# Altium PCB Net.PcbDoc
Units mil, origin at the board's own origin, x right, y up, seen from the top; angles counter-clockwise.
Board outline 860 x 1460 mil, 2 copper layers (Top Layer, Bottom Layer), stack 22.822 mil thick; 20 components, 20 nets, 130 pads, 11 vias.
Unrouted connection lines stored in the file: 6.
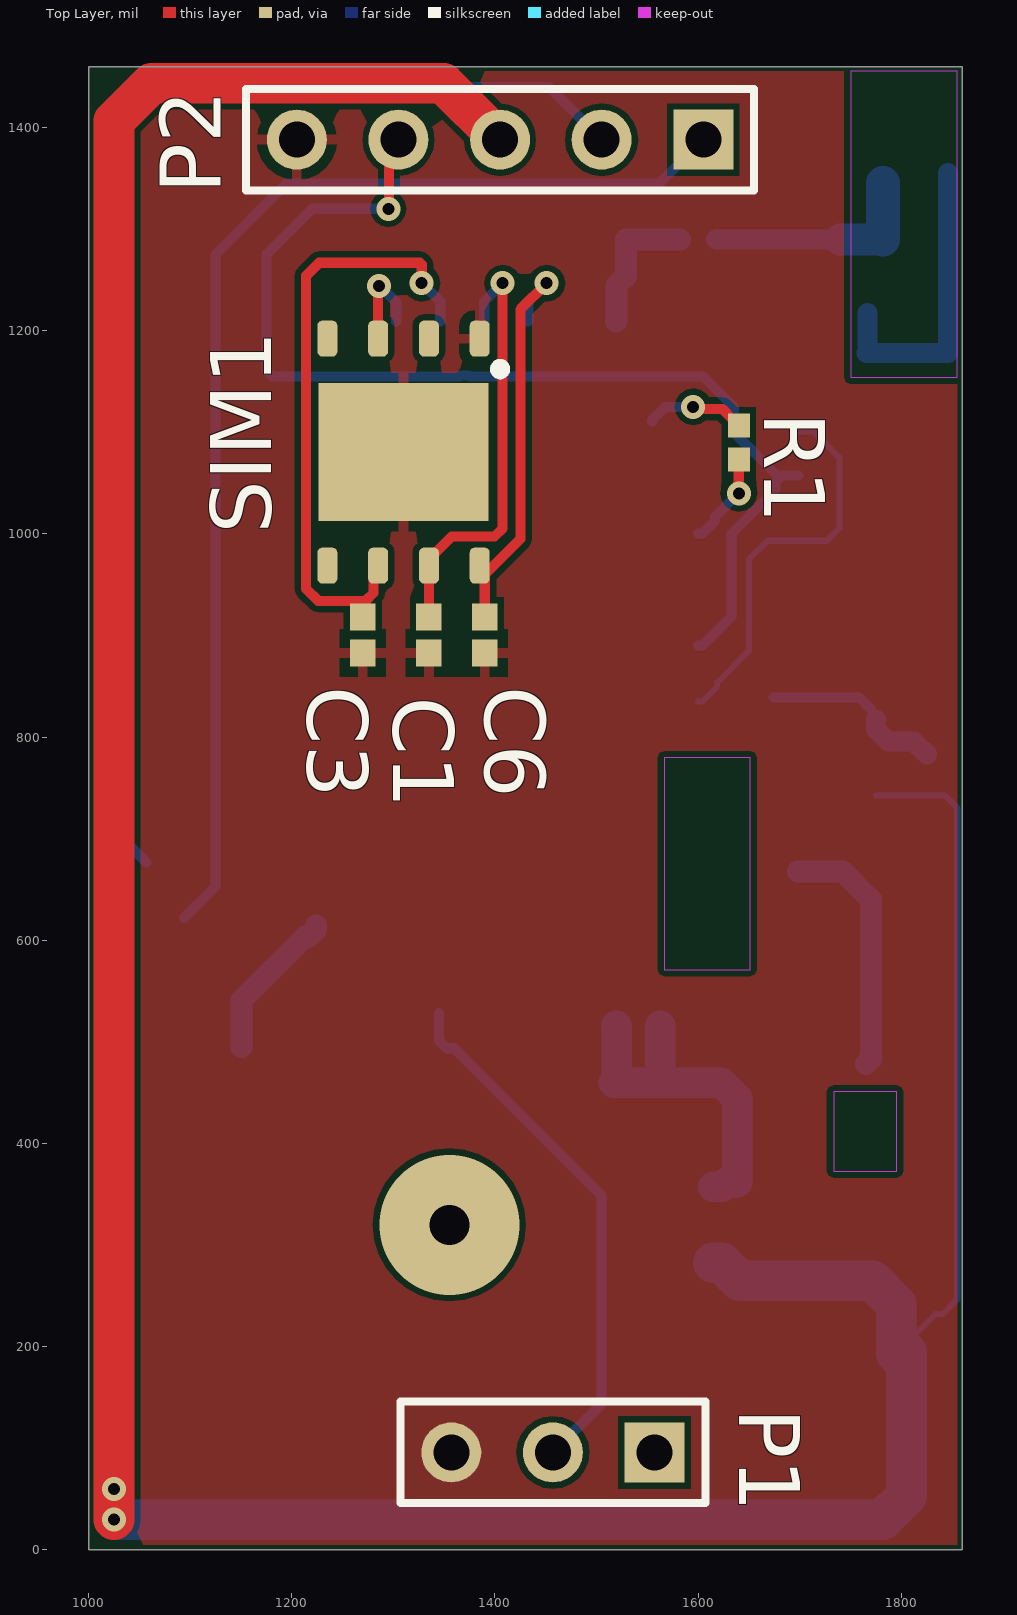
[diagram p0: Top Layer view]
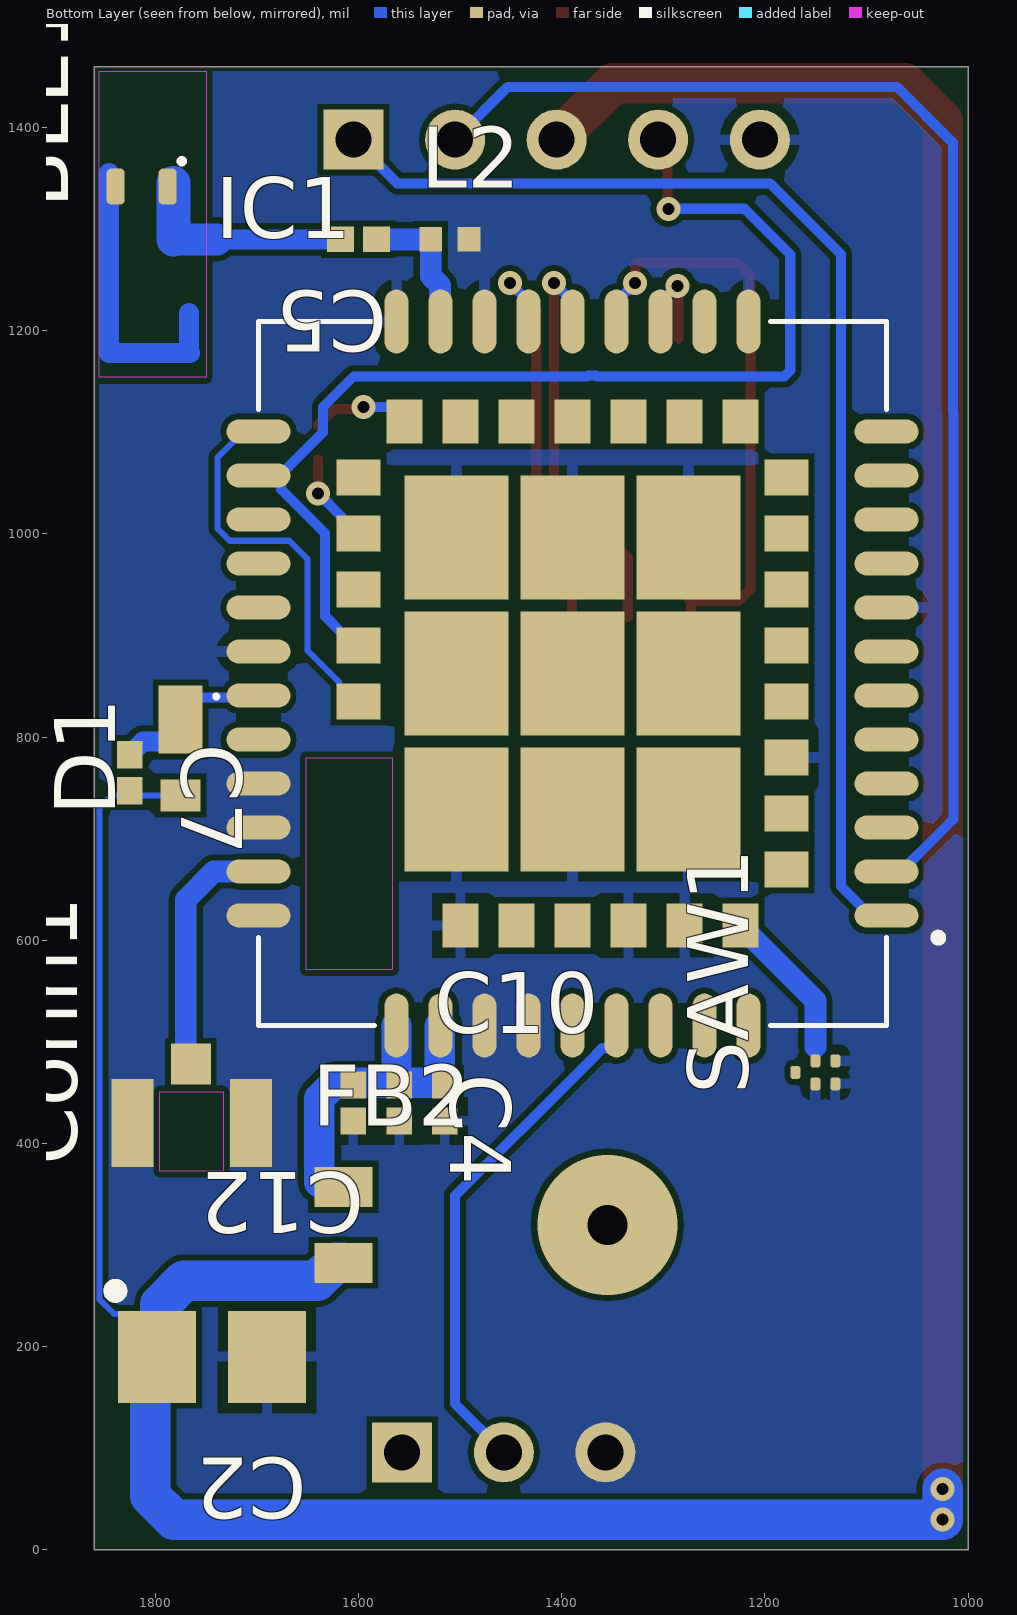
[diagram p1: Bottom Layer view, seen from below]
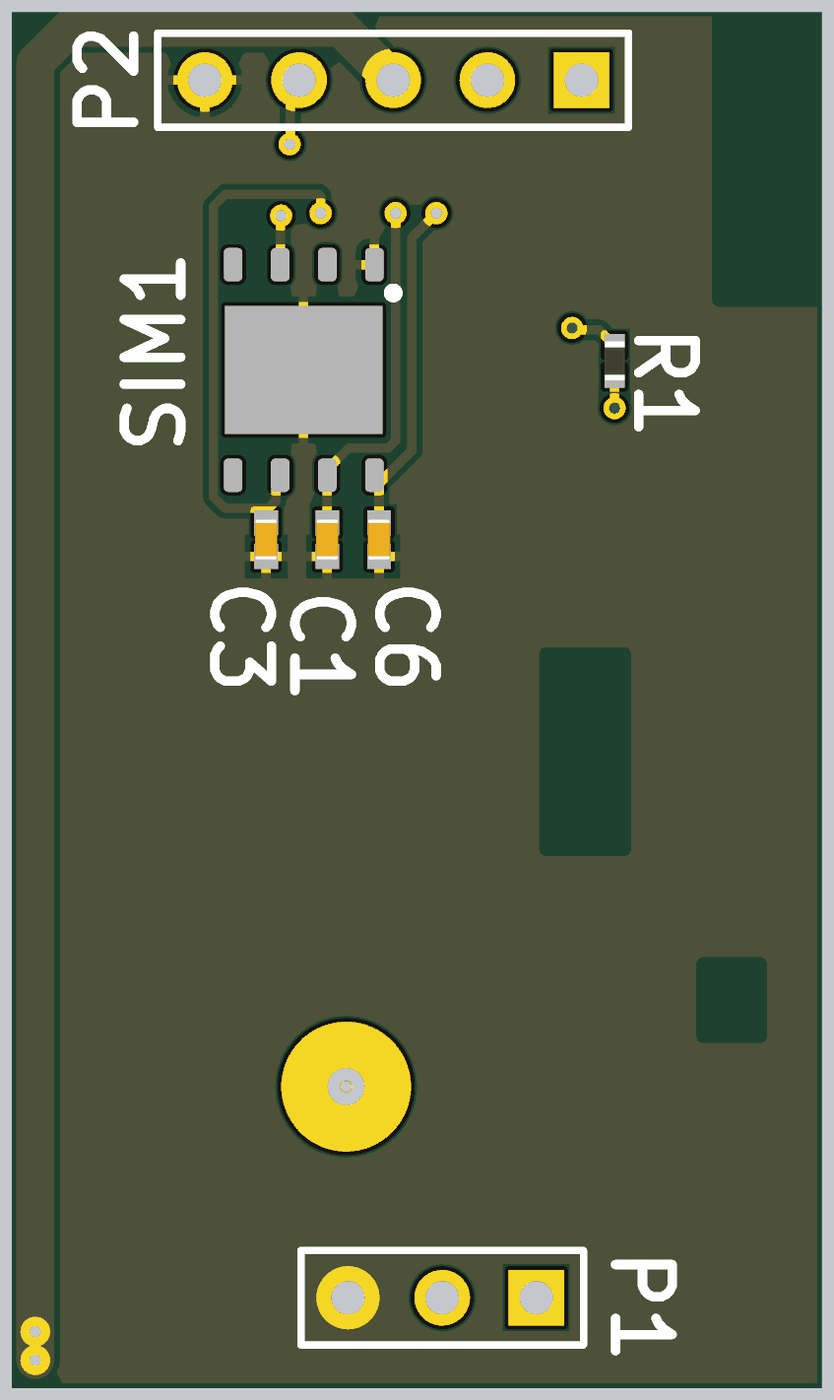
[diagram p2: 3D render of the assembled board from above, using the file's embedded part models]
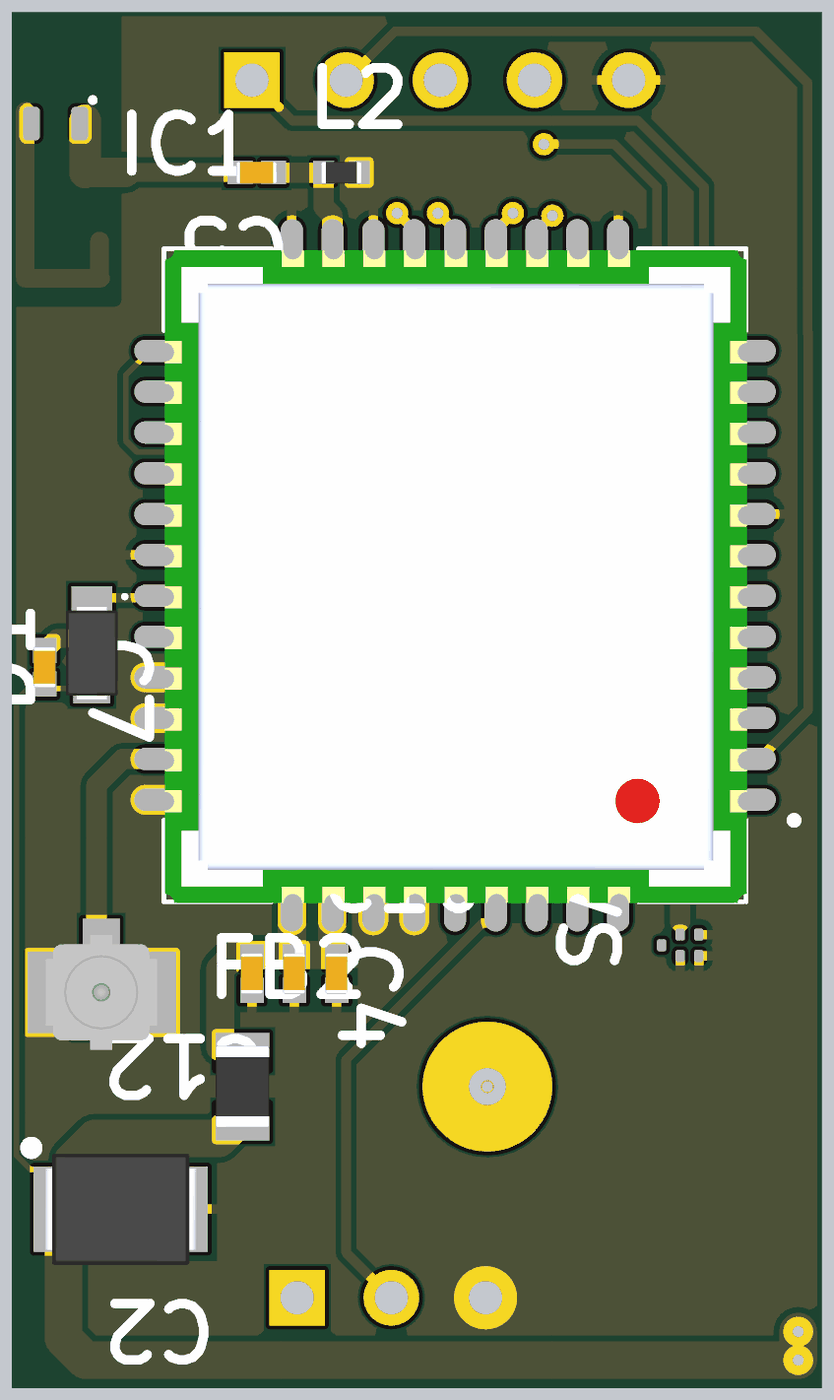
[diagram p3: 3D render of the assembled board from below, using the file's embedded part models]

## Layer stack, top to bottom
Top Solder: solder mask 0.4, Solder Resist, Dk 3.5
Top Layer: signal copper 1.378
Dielectric 1: prepreg 20.066, PP-007, Dk 4.25
Bottom Layer: signal copper 1.378
Bottom Solder: solder mask 0.4, Solder Resist, Dk 3.5

## Board outline
1000,0 1860,0 1860,1460 1000,1460

## Design rules (kind name [scope] priority, off if disabled: settings)
Clearance [All] p1: gap=6 ignorepadtopadclearanceinfootprint=FALSE
PlaneConnect [All] p1: pad.planeconnectstyle=Relief pad.reliefexpansion=20 pad.reliefentries=4 pad.reliefconductorwidth=10 pad.reliefairgap=10 via.planeconnectstyle=Direct via.reliefexpansion=20 via.reliefentries=4 via.reliefconductorwidth=10 via.reliefairgap=10
PolygonConnect [All] p1: connectstyle=Relief reliefconductorwidth=10 reliefentries=4 polygonreliefangle="90 Angle" airgapwidth=10
RoomDefinition Net [InComponentClass('Net')] p1 off: confinementstyle=ConfineIn formatcopy=TRUE lockcomponents=FALSE outline 2155,-40 4750,-40 4750,580 2155,580
RoutingVias [All] p1: holewidth=11.81 width=23.62 viastyle="Through Hole" minholewidth=11.81 minwidth=23.62 maxholewidth=39.37 maxwidth=59.06
SolderMaskExpansion [All] p1: expansion=4 istentingtop=FALSE
Width antenne [InNetClass('antenne')] p1: maxlimit=21.59 minlimit=21.59 preferedwidth=21.59 impedanceprofiledriven=TRUE impedanceprofileid={338AAD26-193B-48B1-B657-317FF01A63F2} impedanceprofilevalue=50.000000 minimp=50.000000 maximp=50.000000 favimp=50.000000
Width [All] p2: maxlimit=50 minlimit=6 preferedwidth=10
29 further rules are at their usual default settings.

## Components (designator, comment, footprint, x,y, rotation, side; value= is the part's Value field where it differs from the comment)
BLE1 "BLE chip" "BLE antenna" 1839.08,1341.92 r180 bottom locked
C1 "22p" CAPC1005X06N 1335,900.48 r90 top
C2 "100u" CAPMP3528X21N 1744.25,190 r180 bottom
C3 "22p" CAPC1005X06N 1270,900.48 r90 top
C4 "22p" CAPC1005X06N 1560,440 r90 bottom
C5 "8.2p" CAPC1005X06N 1600,1290 r180 bottom
C6 "100n" CAPC1005X06N 1390,900.48 r270 top
C7 "22p" CAPC1005X06N 1825,765 r90 bottom
C10 "100n" CAPC1005X06N 1515,440 r270 bottom
C12 "10p" CAPC1005X06N 1605,440 r90 bottom
Conn1 "2337019-1" IPEX_CONNECTOR_RF 1842.37,420.04 r180 bottom
D1 "SS13HE" SODFL250X75-2N 1775,780 r270 bottom
FB2 "FBMH2012HM221-T" INDC2012X14N 1615,320 r270 bottom
IC1 "SIM868e" SIM868E 1079.37,1207.56 r0 bottom
L2 "1.5n" INDC1005X06N 1510,1290 r0 bottom
P1 "Header 3" HDR1X3 1556.97,95.98 r180 top locked
P2 "Header 5" HDR1X5 1605,1387.99 r180 top locked
R1 "10k" RESC1005X04N 1640,1090 r90 top
SAW1 "GPS filter" SAW 1170,470 r180 bottom
SIM1 "SIM-E-MFF2-GL" "MFF2 SIM" 1385,1192.21 r270 top

## Footprints (in the part's own frame and the unit in brackets; to place one, negate y for a bottom-side part, rotate by r counter-clockwise, add the part's x,y. Pads: shape width x height; smd on the part's side, far side on the other; paste and mask are expansions set on the pad)
"BLE antenna" [mm] "antenna bluethooth"
  rrect50% 0.45x0.9 smd: 1(1.3,0) 2(0,0)
  silkscreen extent 1.65,0.63 1.66,0.64
CAPC1005X06N [mm] "Chip Capacitor, 0402, 2-Leads, Body 1,02x0,50mm, IPC Medium Density"
  rect 0.68x0.64 smd: 1(-0.45,0) 2(0.45,0)
  body extent -0.55,-0.3 0.55,0.3, height 0.6
CAPMP3528X21N [mm] "Molded Capacitor, 2-Leads, Body 3,50x2,80mm, IPC Medium Density"
  rect 1.95x2.3 smd: 1(-1.375,0) 2(1.375,0)
  silkscreen extent -2.56,1.5 -2.26,1.8, body extent -2.07,-1.5 2.07,1.5, height 2.1
HDR1X3 [mm] "Connector; Header; 3 Position"
  rect 1.5x1.5 hole 0.9: 1(0,0)
  round 1.5 hole 0.9: 2(2.54,0) 3(5.08,0)
  silkscreen extent -1.27,-1.27 6.35,1.27
HDR1X5 [mm] "Connector; Header; 5 Position"
  rect 1.5x1.5 hole 0.9: 1(0,0)
  round 1.5 hole 0.9: 2(2.54,0) 3(5.08,0) 4(7.62,0) 5(10.16,0)
  silkscreen extent -1.27,-1.27 11.43,1.27
INDC1005X06N [mm] "Chip Inductor, 2-Leads, Body 1,00x0,50mm, IPC Medium Density"
  rect 0.57x0.62 smd: 1(-0.48,0) 2(0.48,0)
  body extent -0.55,-0.3 0.55,0.3, height 0.6
INDC2012X14N [mm] "Chip Inductor, 2-Leads, Body 2,00x1,25mm, IPC Medium Density"
  rect 1x1.45 smd: 1(-0.95,0) 2(0.95,0)
  body extent -1.1,-0.72 1.1,0.72, height 1.45
IPEX_CONNECTOR_RF [mm]
  rect 1x1.02 smd: 1(1.965,1.479)
  rect 1.05x2.2 smd: 2(0.508,0) 2(3.464,-0.001)
  Keep-Out Layer region: 1.192,-1.201 1.192,0.785 2.771,0.785 2.771,-1.201
  body extent 0.47,-1.55 3.47,1.55, height 1.23
"MFF2 SIM" [mm] "SIM-E-MFF2-GL footprint"
  rrect50% 0.9x0.5 smd: 1(0,0) 2(0,-1.27) 3(0,-2.54) 4(0,-3.81) 5(5.675,-3.81) 6(5.675,-2.54) 7(5.675,-1.27) 8(5.675,0)
  rect 3.45x4.25 smd: 9(2.838,-1.905)
  silkscreen extent 0.64,0.38 0.89,0.64, body extent -0.25,-4.44 5.89,0.6, height 0.75
RESC1005X04N [mm] "Chip Resistor, 0402, 2-Leads, Body 1,00x0,50mm, IPC Medium Density"
  rect 0.6x0.55 smd: 1(-0.425,0) 2(0.425,0)
  body extent -0.53,-0.28 0.53,0.28, height 0.37
SAW [mm] "filtro saw"
  rrect50% 0.25x0.325 smd: 1(0,0) 2(0.5,-0.288) 3(1,-0.288) 4(0.5,0.288) 5(1,0.288)
  body extent -0.24,-0.64 1.4,0.64, height 0.7
SIM868E [mm]
  oval 1.6x0.6 smd: 1(0.024,14.813) 2(0.024,13.713) 3(0.024,12.613) 4(0.024,11.513) 5(0.024,10.413) 6(0.024,9.313) 7(0.024,8.213) 8(0.024,7.113) 9(0.024,6.013) 10(0.024,4.913) 11(0.024,3.813) 12(0.024,2.713) 22(15.724,2.713) 23(15.724,3.813) 24(15.724,4.913) 25(15.724,6.013) 26(15.724,7.113) 27(15.724,8.213) 28(15.724,9.313) 29(15.724,10.413) 30(15.724,11.513) 31(15.724,12.613) 32(15.724,13.713) 33(15.724,14.813)
  oval 0.6x1.6 smd: 13(3.474,-0.037) 14(4.574,-0.037) 15(5.674,-0.037) 16(6.774,-0.037) 17(7.874,-0.037) 18(8.974,-0.037) 19(10.074,-0.037) 20(11.174,-0.037) 21(12.274,-0.037) 34(12.274,17.563) 35(11.174,17.563) 36(10.074,17.563) 37(8.974,17.563) 38(7.874,17.563) 39(6.774,17.563) 40(5.674,17.563) 41(4.574,17.563) 42(3.474,17.563)
  rect 1.1x0.9 smd paste-2: 43(2.524,13.663) 44(2.524,12.263) 45(2.524,10.863) 46(2.524,9.463) 47(2.524,8.063) 48(2.524,6.663) 49(2.524,5.263) 50(2.524,3.863) 58(13.224,3.863) 59(13.224,5.263) 60(13.224,6.663) 61(13.224,8.063) 62(13.224,9.463)
  rect 0.9x1.1 smd paste-2: 51(3.674,2.463) 52(5.074,2.463) 53(6.474,2.463) 54(7.874,2.463) 55(9.274,2.463) 56(10.674,2.463) 57(12.074,2.463) 63(10.674,15.063) 64(9.274,15.063) 65(7.874,15.063) 66(6.474,15.063) 67(5.074,15.063) 68(3.674,15.063)
  rect 2.6x3.1 smd paste-3: 69(4.974,12.163) 70(4.974,8.763) 71(4.974,5.363) 72(7.874,5.363) 73(10.774,5.363) 74(10.774,8.763) 75(10.774,12.163) 76(7.874,12.163) 77(7.874,8.763)
  Keep-Out Layer region: 14.524,10.867 12.382,10.867 12.382,16.163 14.524,16.163
  Keep-Out Layer region: 14.524,10.865 12.378,10.865 12.378,16.163 14.524,16.163
  Keep-Out Layer region: 14.524,10.864 12.376,10.864 12.376,16.163 14.524,16.163
  silkscreen extent -1.37,-0.04 15.72,17.56, body extent 0,0 15.7,17.6, height 2.6
SODFL250X75-2N [mm] "SODFL, 2-Leads, Body 1,27x2,50mm, IPC Medium Density"
  rect 0.8x1 smd: 1(0.95,0)
  rect 1.7x1.1 smd: 2(-0.95,0)
  silkscreen extent -1.57,0.84 -1.47,0.94, body extent -1.25,-0.7 1.25,0.7, height 0.75

## Part data
BLE1: library part 2450AT14A0100T, "RF ANT 2.4GHZ CHIP SOLDER SMD", Manufacturer=Johanson, Max Power Dissipation=2W, Supplier Part Number 1=712-1636-1-ND, ComponentLink1Description=https://www.johansontechnology.com/datasheets/2450AT14A0100/2450AT14A0100.pdf?src-supplier=Digi-Key, ComponentLink1URL=https://www.johansontechnology.com/datasheets/2450AT14A0100/2450AT14A0100.pdf?src-supplier=Digi-Key, Manufacturer Part Number=2450AT14A0100T, Mount="Surface Mount", Number of Bands=1, Packaging="Tape and Reel", Pricing 1="1=0,42000, 10=0,35600, 25=0,33240, 100=0,26600, 250=0,24700, 500=0,20900, 1000=0,16150 (USD)", Return Loss=9dB, RoHS=No, Stock 1=5238, Supplier 1=Digi-Key, Termination=Solder
C1 C3 C4 C7: library part 04025A220GAT2A, "CAP CER 22PF 50V C0G/NP0 0402", Capacitance=22pF, Case Code (Imperial)=0402, Case Code (Metric)=1005, Dielectric=C0G, Manufacturer="Kyocera AVX", Max Operating Temperature=125°C, Min Operating Temperature=-55°C, Package Quantity=1, Supplier Part Number 1=478-7874-1-ND, Tolerance=2%, Voltage Rating=50V, Case/Package=0402, Category="Ceramic Capacitors", ComponentLink1Description=https://datasheet.ciiva.com/7614/ccog-7614677.pdf?src-supplier=Digi-Key, ComponentLink1URL=https://datasheet.ciiva.com/7614/ccog-7614677.pdf?src-supplier=Digi-Key, ComponentLink2Description=https://datasheet.ciiva.com/17490/ccog-17490486.pdf?src-supplier=Avnet+Europe, ComponentLink2URL=https://datasheet.ciiva.com/17490/ccog-17490486.pdf?src-supplier=Avnet+Europe, ComponentLink3Description=https://datasheet.ciiva.com/5413/ccog-243403-5413992.pdf?src-supplier=Mouser, ComponentLink3URL=https://datasheet.ciiva.com/5413/ccog-243403-5413992.pdf?src-supplier=Mouser, ComponentLink4Description=https://datasheet.ciiva.com/210/ccog-210553.pdf?src-supplier=Digi-Key, ComponentLink4URL=https://datasheet.ciiva.com/210/ccog-210553.pdf?src-supplier=Digi-Key, ComponentLink5Description=https://datasheet.ciiva.com/11530/ccog-11530027.pdf?src-supplier=Avnet, ComponentLink5URL=https://datasheet.ciiva.com/11530/ccog-11530027.pdf?src-supplier=Avnet, ComponentLink6Description=https://datasheet.ciiva.com/14886/ccog-14886974.pdf?src-supplier=Digi-Key, ComponentLink6URL=https://datasheet.ciiva.com/14886/ccog-14886974.pdf?src-supplier=Digi-Key, Construction=Flat, Depth=0.5mm, Height=0.63mm, Lead Free="Lead Free", Length=1mm, Manufacturer Part Number=04025A220GAT2A, Mount="Surface Mount", Packaging="Tape and Reel", Pricing 1="1=0,50000, 10=0,35200, 50=0,26600, 100=0,23170, 500=0,17160, 1000=0,14586, 2500=0,13728, 5000=0,12870 (USD)", Radiation Hardening=No, RoHS=Yes, RoHS Compliant=Yes, Series=-, Stock 1=14713, Supplier 1=Digi-Key, Termination=SMD/SMT, Thickness=0.022inch, Voltage Rating (DC)=50V, Width=0.02inch
C2: library part TPSB107K006R0250, "Capacitor; Tantalum; Cap 100 uF; Tol 10%; Vol-Rtg 6.3 VDC; SMT; 3528; ESR 250 mOhms; CT", Capacitance=100uF, Case Code (Imperial)=1210, Case Code (Metric)=3528, Dielectric Material=Tantalum, ESR (Equivalent Series Resistance)=250mR, Leakage Current=6.3uA, Manufacturer="Kyocera AVX", Max Operating Temperature=125°C, Min Operating Temperature=-55°C, Package Quantity=1, Supplier Part Number 1=478-3080-1-ND, Tolerance=10%, Voltage=6.3V, Case/Package=1210, Category="Tantalum Capacitors", ComponentLink1Description=https://datasheet.ciiva.com/264/tps-264099.pdf?src-supplier=Digi-Key, ComponentLink1URL=https://datasheet.ciiva.com/264/tps-264099.pdf?src-supplier=Digi-Key, ComponentLink2Description=https://datasheet.ciiva.com/16501/tps-16501596.pdf?src-supplier=Future+Electronics, ComponentLink2URL=https://datasheet.ciiva.com/16501/tps-16501596.pdf?src-supplier=Future+Electronics, ComponentLink3Description=https://datasheet.ciiva.com/14603/70001047-14603743.pdf?src-supplier=Allied+Electronics, ComponentLink3URL=https://datasheet.ciiva.com/14603/70001047-14603743.pdf?src-supplier=Allied+Electronics, ComponentLink4Description=https://datasheet.ciiva.com/264/tps-264097.pdf?src-supplier=Digi-Key, ComponentLink4URL=https://datasheet.ciiva.com/264/tps-264097.pdf?src-supplier=Digi-Key, ComponentLink5Description=https://datasheet.ciiva.com/264/tps-264098.pdf?src-supplier=Digi-Key, ComponentLink5URL=https://datasheet.ciiva.com/264/tps-264098.pdf?src-supplier=Digi-Key, ComponentLink6Description=https://datasheet.ciiva.com/3004/tps-3004597.pdf?src-supplier=Avnet, ComponentLink6URL=https://datasheet.ciiva.com/3004/tps-3004597.pdf?src-supplier=Avnet, ComponentLink7Description=https://datasheet.ciiva.com/7720/1680477-7720696.pdf?src-supplier=Element14, ComponentLink7URL=https://datasheet.ciiva.com/7720/1680477-7720696.pdf?src-supplier=Element14, ComponentLink8Description=https://datasheet.ciiva.com/22703/1441576-22703321.pdf?src-supplier=Element14, ComponentLink8URL=https://datasheet.ciiva.com/22703/1441576-22703321.pdf?src-supplier=Element14, ComponentLink9Description=https://datasheet.ciiva.com/12911/tps-23028-12911388.pdf?src-supplier=Mouser, ComponentLink9URL=https://datasheet.ciiva.com/12911/tps-23028-12911388.pdf?src-supplier=Mouser, ComponentLink10Description=https://datasheet.ciiva.com/17339/tps-17339804.pdf?src-supplier=Avnet+Europe, ComponentLink10URL=https://datasheet.ciiva.com/17339/tps-17339804.pdf?src-supplier=Avnet+Europe, Construction=Flat, Depth=2.8mm, Dissipation Factor=10%, Features="General Purpose", Height=1.9mm, Height - Seated (Max)=0.083inch, Lead Free="Lead Free", Lead Pitch=1.4mm, Length=3.5mm, Manufacturer Part Number=TPSB107K006R0250, Mount="Surface Mount,PCB", Number of Pins=2, Packaging="Tape and Reel", Polarity=Polar, Pricing 1="1=0,51000, 10=0,36100, 50=0,27280, 100=0,23760, 500=0,17600, 1000=0,14960 (USD)", Radiation Hardening=No, REACH SVHC="No SVHC", RoHS=Yes, RoHS Compliant=Yes, Series=TPS, Supplier 1=Digi-Key, Termination=SMD/SMT, Voltage Rating=6.3V, Voltage Rating (DC)=6.3V, Weight=0.000564oz, Width=0.11inch
C5: library part GJM1555C1H8R2CB01D, "0402 8.2 pF 50V ±0.25 pF Tolerance C0G SMT Multilayer Ceramic Capacitor", Capacitance=8.2pF, Case Code (Imperial)=0402, Case Code (Metric)=1005, Dielectric=C0G, Manufacturer=Murata, Max Operating Temperature=125°C, Min Operating Temperature=-55°C, Package Quantity=1, Supplier Part Number 1=490-3110-1-ND, Temperature Coefficient=30ppm/°C, Voltage=50V, Case/Package=0402, Category="Ceramic Capacitors", ComponentLink1Description=https://datasheet.ciiva.com/8030/1700180-8030128.pdf?src-supplier=Element14, ComponentLink1URL=https://datasheet.ciiva.com/8030/1700180-8030128.pdf?src-supplier=Element14, ComponentLink2Description=https://datasheet.ciiva.com/17453/product-17453509.pdf?src-supplier=Avnet+Europe, ComponentLink2URL=https://datasheet.ciiva.com/17453/product-17453509.pdf?src-supplier=Avnet+Europe, ComponentLink3Description=https://datasheet.ciiva.com/11610/product-11610070.pdf?src-supplier=Avnet, ComponentLink3URL=https://datasheet.ciiva.com/11610/product-11610070.pdf?src-supplier=Avnet, ComponentLink4Description=https://datasheet.ciiva.com/159/partnumbering-e-01-159560.pdf?src-supplier=Digi-Key, ComponentLink4URL=https://datasheet.ciiva.com/159/partnumbering-e-01-159560.pdf?src-supplier=Digi-Key, ComponentLink5Description=https://datasheet.ciiva.com/159/partnumbering-e-01-159561.pdf?src-supplier=Digi-Key, ComponentLink5URL=https://datasheet.ciiva.com/159/partnumbering-e-01-159561.pdf?src-supplier=Digi-Key, ComponentLink6Description=https://datasheet.ciiva.com/11463/product-11463819.pdf?src-supplier=Avnet, ComponentLink6URL=https://datasheet.ciiva.com/11463/product-11463819.pdf?src-supplier=Avnet, Construction=Flat, Depth=0.5mm, Height=0.5mm, Lead Free="Lead Free", Lead Pitch=0.3mm, Length=1mm, Manufacturer Part Number=GJM1555C1H8R2CB01D, Mount="Surface Mount", Number of Pins=2, Packaging="Tape and Reel", Pricing 1="1=0,12000, 10=0,08500, 50=0,04620, 100=0,03770, 500=0,02696, 1000=0,02118, 2500=0,01925, 5000=0,01771 (USD)", Radiation Hardening=No, REACH SVHC="No SVHC", RoHS=Yes, RoHS Compliant=Yes, Series=GJM, Stock 1=78290, Supplier 1=Digi-Key, Termination=SMD/SMT, Thickness=0.022inch, Voltage Rating=50V, Voltage Rating (DC)=50V, Width=0.5mm
C6 C10: library part GRM155R71C104KA88D, "CAP CER 0.1UF 16V X7R 0402", Capacitance=100nF, Case Code (Imperial)=0402, Case Code (Metric)=1005, Dielectric=X7R, Dielectric Material=Ceramic, Insulation Resistance=10GR, Manufacturer=Murata, Max Operating Temperature=125°C, Min Operating Temperature=-55°C, Package Quantity=1, Supplier Part Number 1=81-GRM155R71C104KA88, Tolerance=10%, Voltage=16V, Case/Package=0402, Category="Ceramic Capacitors", ComponentLink1Description=https://datasheet.ciiva.com/18102/getdatasheetpartid-85307-18102905.pdf?src-supplier=Verical, ComponentLink1URL=https://datasheet.ciiva.com/18102/getdatasheetpartid-85307-18102905.pdf?src-supplier=Verical, ComponentLink2Description=https://datasheet.ciiva.com/129/grm155r71c104ka88-01-129739.pdf?src-supplier=Digi-Key, ComponentLink2URL=https://datasheet.ciiva.com/129/grm155r71c104ka88-01-129739.pdf?src-supplier=Digi-Key, ComponentLink3Description=https://datasheet.ciiva.com/129/grm155r71c104ka88-01-129740.pdf?src-supplier=Digi-Key, ComponentLink3URL=https://datasheet.ciiva.com/129/grm155r71c104ka88-01-129740.pdf?src-supplier=Digi-Key, ComponentLink4Description=https://datasheet.ciiva.com/29199/454098-da-01-en-vs-kondensator-0402-29199799.pdf?src-supplier=Conrad, ComponentLink4URL=https://datasheet.ciiva.com/29199/454098-da-01-en-vs-kondensator-0402-29199799.pdf?src-supplier=Conrad, ComponentLink5Description=https://datasheet.ciiva.com/28534/4360-28534133.pdf?src-supplier=Element14, ComponentLink5URL=https://datasheet.ciiva.com/28534/4360-28534133.pdf?src-supplier=Element14, ComponentLink6Description=https://datasheet.ciiva.com/14103/grmseries-highdielectrictype-eng-14103750.pdf?src-supplier=Distrelec, ComponentLink6URL=https://datasheet.ciiva.com/14103/grmseries-highdielectrictype-eng-14103750.pdf?src-supplier=Distrelec, ComponentLink7Description=https://datasheet.ciiva.com/16199/product-16199000.pdf?src-supplier=Future+Electronics, ComponentLink7URL=https://datasheet.ciiva.com/16199/product-16199000.pdf?src-supplier=Future+Electronics, ComponentLink8Description=https://datasheet.ciiva.com/14116/grmseries-highdielectrictype-eng-14116878.pdf?src-supplier=Distrelec, ComponentLink8URL=https://datasheet.ciiva.com/14116/grmseries-highdielectrictype-eng-14116878.pdf?src-supplier=Distrelec, ComponentLink9Description=https://datasheet.ciiva.com/7937/4360-7937615.pdf?src-supplier=Element14, ComponentLink9URL=https://datasheet.ciiva.com/7937/4360-7937615.pdf?src-supplier=Element14, ComponentLink10Description=https://datasheet.ciiva.com/28534/4360-28534127.pdf?src-supplier=Element14, ComponentLink10URL=https://datasheet.ciiva.com/28534/4360-28534127.pdf?src-supplier=Element14, Depth=0.5mm, Height=0.5mm, Lead Free="Lead Free", Length=1mm, Manufacturer Part Number=GRM155R71C104KA88D, Material=Ceramic, Mount="Surface Mount", Number of Pins=2, Packaging="Tape and Reel", Pricing 1="1=0,10000, 10=0,01200, 50=0,01200, 100=0,01000, 1000=0,00600, 10000=0,00300 (USD)", Radiation Hardening=No, REACH SVHC="No SVHC", RoHS=Yes, RoHS Compliant=Yes, Stock 1=8059685, Supplier 1=Mouser, Termination=SMD/SMT, Thickness=0.022inch, Voltage Rating=16V, Voltage Rating (DC)=16V, Width=0.5mm
C12: library part 04023J100FBSTR, "Multilayer Ceramic Capacitors MLCC - SMD/SMT 25V 10pF ThnFlm 0402 1% Tol", Capacitance=10pF, Case Code (Imperial)=0402, Case Code (Metric)=1005, Manufacturer="Kyocera AVX", Max Operating Temperature=125°C, Min Operating Temperature=-55°C, Resistor Type="Thin Film", Supplier Part Number 1=581-04023J100FBSTR, Tolerance=1%, Voltage Rating (DC)=25V, Case/Package=0402, Category="Film Capacitors", ComponentLink1Description=http://www.mouser.com/ds/2/40/avx_accuf-p-542740.pdf?src-supplier=Mouser, ComponentLink1URL=http://www.mouser.com/ds/2/40/avx_accuf-p-542740.pdf?src-supplier=Mouser, Height=0.4mm, Length=1mm, Manufacturer Part Number=04023J100FBSTR, Packaging="Tape and Reel", Pricing 1="1=0,98000, 10=0,74000, 50=0,74000, 100=0,52900, 1000=0,35300, 10000=0,26100 (USD)", RoHS=Yes, Stock 1=1287, Supplier 1=Mouser, Termination=SMD/SMT, Weight=2.3E-05oz, Width=0.5mm
Conn1: "RF Connector; Coaxial Connectors MicroCoax receptacle UMCC Gen 1", Manufacturer="TE Connectivity", Supplier Part Number 1=A144746CT-ND, Category="RF / Coaxial Connectors", Manufacturer Part Number=2337019-1, Pricing 1="1=0,19000, 10=0,18000, 25=0,15360, 50=0,13440, 100=0,12470, 250=0,11032, 500=0,10554, 1000=0,08635, 2500=0,07915 (USD)", RoHS=Yes, Stock 1=3490, Supplier 1=Digi-Key
D1: "SS13HE Series 30 V 1 A Surface Mount Schottky Barrier Rectifier - SOD-323HE", Average Rectified Current=1A, Case/Package=SMD/SMT, Manufacturer="ON Semiconductor / Fairchild", Max Forward Surge Current (Ifsm)=25A, Max Repetitive Reverse Voltage (Vrrm)=30V, Supplier Part Number 1=SS13HECT-ND, Category="Rectifier Diodes", ComponentLink1Description=https://www.fairchildsemi.com/datasheets/SS/SS13HE.pdf?src-supplier=Digi-Key, ComponentLink1URL=https://www.fairchildsemi.com/datasheets/SS/SS13HE.pdf?src-supplier=Digi-Key, Element Configuration=Single, Manufacturer Part Number=SS13HE, Max Reverse Voltage (DC)=30V, Mount="Surface Mount", Packaging="Tape and Reel", Pricing 1="1=0,50000, 10=0,34900, 100=0,17640, 500=0,14392, 1000=0,10678 (USD)", Reverse Recovery Time=5.6ns, RoHS=No, RoHS Compliant=No, Stock 1=102, Supplier 1=Digi-Key, Weight=0.006g
FB2: "Ferrite Beads HI CUR CHIP BD 0805 220OHMS 25%", Case Code (Imperial)=0805, Case Code (Metric)=2012, DC Resistance (DCR)=60mR, Frequency=100MHz, Manufacturer="Taiyo Yuden", Max Current Rating=2A, Max Operating Temperature=125°C, Min Operating Temperature=-40°C, Package Quantity=1, Resistor Type="Ferrite Bead", Supplier Part Number 1=587-1748-1-ND, Tolerance=25%, Case/Package=0805, Category="Ferrite Beads and Chips", ComponentLink1Description=https://datasheet.ciiva.com/25614/0900766b810b37be-25614417.pdf?src-supplier=RSComponents, ComponentLink1URL=https://datasheet.ciiva.com/25614/0900766b810b37be-25614417.pdf?src-supplier=RSComponents, ComponentLink2Description=https://datasheet.ciiva.com/6212/fbmh2012hm221-t-ss-6212838.pdf?src-supplier=Digi-Key, ComponentLink2URL=https://datasheet.ciiva.com/6212/fbmh2012hm221-t-ss-6212838.pdf?src-supplier=Digi-Key, ComponentLink3Description=https://datasheet.ciiva.com/7966/1734575-7966170.pdf?src-supplier=Element14, ComponentLink3URL=https://datasheet.ciiva.com/7966/1734575-7966170.pdf?src-supplier=Element14, ComponentLink4Description=https://datasheet.ciiva.com/6212/chipbeads01-e-6212839.pdf?src-supplier=Digi-Key, ComponentLink4URL=https://datasheet.ciiva.com/6212/chipbeads01-e-6212839.pdf?src-supplier=Digi-Key, ComponentLink5Description=https://datasheet.ciiva.com/6212/chipbeads01-e-6212841.pdf?src-supplier=Digi-Key, ComponentLink5URL=https://datasheet.ciiva.com/6212/chipbeads01-e-6212841.pdf?src-supplier=Digi-Key, Core Material=Ferrite, Depth=1.45mm, Halogen Free="Halogen Free", Height=0.041inch, Impedance=220R, Lead Free="Lead Free", Length=2mm, Manufacturer Part Number=FBMH2012HM221-T, Material=Ferrite, Max DC Current=2A, Mount="Surface Mount", Number of Lines=1, Number of Pins=2, Packaging="Tape and Reel", Pricing 1="1=0,18000, 10=0,14800, 25=0,11560, 50=0,09560, 100=0,08250, 250=0,06600, 500=0,05940, 1000=0,04950 (USD)", REACH SVHC="No SVHC", Resistance=60mR, RoHS=Yes, RoHS Compliant=Yes, Series=FB, Shielding=Unshielded, Stock 1=15865, Supplier 1=Digi-Key, Termination=SMD/SMT, Test Frequency=100MHz, Width=0.049inch
IC1: "Sim 828e"
L2: library part LQG15HN1N5S02D, "FIXED IND 1.5NH 1A 100 MOHM", Case Code (Imperial)=0402, Case Code (Metric)=1005, Current Rating=300mA, DC Resistance (DCR)=100mR, Inductance=1.5nH, Inductor Type=MONOLITHIC, Manufacturer=Murata, Max Operating Temperature=125°C, Min Operating Temperature=-55°C, Package Quantity=1, Self Resonant Frequency=6GHz, Supplier Part Number 1=490-1075-1-ND, Test Frequency=100MHz, Case/Package=0402, Category="Fixed Inductors", ComponentLink1Description=https://datasheet.ciiva.com/11801/0900766b80f10808-11801406.pdf?src-supplier=RSComponents, ComponentLink1URL=https://datasheet.ciiva.com/11801/0900766b80f10808-11801406.pdf?src-supplier=RSComponents, ComponentLink2Description=https://datasheet.ciiva.com/17279/l0075s0083lqg15hn-17279189.pdf?src-supplier=Avnet+Europe, ComponentLink2URL=https://datasheet.ciiva.com/17279/l0075s0083lqg15hn-17279189.pdf?src-supplier=Avnet+Europe, ComponentLink3Description=https://datasheet.ciiva.com/4977/o05e-4977527.pdf?src-supplier=Mouser, ComponentLink3URL=https://datasheet.ciiva.com/4977/o05e-4977527.pdf?src-supplier=Mouser, ComponentLink4Description=https://datasheet.ciiva.com/8510/l0075s0083lqg15hn-8510903.pdf?src-supplier=Avnet, ComponentLink4URL=https://datasheet.ciiva.com/8510/l0075s0083lqg15hn-8510903.pdf?src-supplier=Avnet, ComponentLink5Description=https://datasheet.ciiva.com/8002/66026-8002508.pdf?src-supplier=Element14, ComponentLink5URL=https://datasheet.ciiva.com/8002/66026-8002508.pdf?src-supplier=Element14, ComponentLink6Description=https://datasheet.ciiva.com/8002/66026-8002509.pdf?src-supplier=Element14, ComponentLink6URL=https://datasheet.ciiva.com/8002/66026-8002509.pdf?src-supplier=Element14, ComponentLink7Description=https://datasheet.ciiva.com/1063/l0075s0083lqg15hn-1063838.pdf?src-supplier=Digi-Key, ComponentLink7URL=https://datasheet.ciiva.com/1063/l0075s0083lqg15hn-1063838.pdf?src-supplier=Digi-Key, ComponentLink8Description=https://datasheet.ciiva.com/16444/l0075s0083lqg15hn-16444367.pdf?src-supplier=Future+Electronics, ComponentLink8URL=https://datasheet.ciiva.com/16444/l0075s0083lqg15hn-16444367.pdf?src-supplier=Future+Electronics, Core Material=Air, DC Current=300mA, Depth=0.55mm, Height=0.5mm, Height - Seated (Max)=0.022inch, Lead Free="Lead Free", Length=1mm, Manufacturer Part Number=LQG15HN1N5S02D, Max DC Current=300mA, Military Standard=Not, Mount="Surface Mount", Number of Pins=2, Packaging="Tape and Reel", Pricing 1="1=0,10000, 10=0,05300, 25=0,04680, 50=0,03980, 100=0,03510, 250=0,03216, 500=0,02924, 1000=0,02457, 2500=0,02106 (USD)", Q Factor=8, Radiation Hardening=No, REACH SVHC="No SVHC", RoHS=Yes, RoHS Compliant=Yes, Series=LQG15HS, Shielding=Unshielded, Stock 1=23404, Supplier 1=Digi-Key, Termination=SMD/SMT, Width=0.02inch
P1: "Header, 3-Pin", LatestRevisionDate=17-Jul-2002, LatestRevisionNote="Re-released for DXP Platform.", Publisher="Altium Limited", System=Connector
P2: "Header, 5-Pin", LatestRevisionDate=17-Jul-2002, LatestRevisionNote="Re-released for DXP Platform.", Publisher="Altium Limited", System=Connector
R1: library part ERJ-U02F1002X, "RES, THICK FILM, 10K, 1%, 0.1W, 0402, REEL; Product Range:AEC-Q200 ERJ Series; Resistance:10kohm; Power Rating:100mW; Resistance Tolerance: 1%; Voltage Rating:50V; Resistor Case Style:0402 [1005 Metric]; Packaging:Tape & Reel; MSL:-;RoHS Compliant: Yes", Case Code (Imperial)=0402, Case Code (Metric)=1005, Current Rating=1A, Manufacturer=Panasonic, Max Operating Temperature=155°C, Min Operating Temperature=-55°C, Package Quantity=10000, Power Rating=100mW, Resistance=10kR, Resistor Type="Thick Film", Supplier Part Number 1=667-ERJ-U02F1002X, Temperature Coefficient=200ppm/°C, Tolerance=1%, Voltage Rating=50V, Case/Package=0402, Category="Chip SMD Resistors", ComponentLink1Description=https://datasheet.ciiva.com/29928/aoa0000ce5-29928150.pdf?src-supplier=Avnet, ComponentLink1URL=https://datasheet.ciiva.com/29928/aoa0000ce5-29928150.pdf?src-supplier=Avnet, ComponentLink2Description=https://datasheet.ciiva.com/28514/1783557-28514361.pdf?src-supplier=Element14, ComponentLink2URL=https://datasheet.ciiva.com/28514/1783557-28514361.pdf?src-supplier=Element14, ComponentLink3Description=https://datasheet.ciiva.com/28514/1783557-28514367.pdf?src-supplier=Element14, ComponentLink3URL=https://datasheet.ciiva.com/28514/1783557-28514367.pdf?src-supplier=Element14, Height=0.35mm, Length=1mm, Manufacturer Part Number=ERJ-U02F1002X, Mount="Surface Mount", Packaging="Tape and Reel", Pricing 1="1=0,10000, 10=0,05100, 50=0,05100, 100=0,02900, 1000=0,01600, 10000=0,01200 (USD)", Radiation Hardening=No, REACH SVHC=Unknown, RoHS=Yes, RoHS Compliant=Yes, Stock 1=30000, Supplier 1=Mouser, Termination=SMD/SMT, Voltage Rating (DC)=50V, Weight=2.8E-05oz, Width=0.5mm
SAW1: library part SF14-1582M5UUD2, "Signal Conditioning SAW FILTER 1582MHz", Frequency=1.582GHz, Manufacturer="Kyocera AVX", Max Operating Temperature=85°C, Min Operating Temperature=-40°C, Package Quantity=3000, Supplier Part Number 1=581-SF14-1582M5UUD2, Category="EMI / RFI Components", ComponentLink1Description=http://www.mouser.com/ds/2/40/AVX_140127%20Connectivity-315907.pdf?src-supplier=Mouser, ComponentLink1URL=http://www.mouser.com/ds/2/40/AVX_140127%20Connectivity-315907.pdf?src-supplier=Mouser, ComponentLink2Description=http://global.kyocera.com/prdct/electro/pdf/saw/sf14_cdma_e.pdf?src-supplier=Avnet+Asia, ComponentLink2URL=http://global.kyocera.com/prdct/electro/pdf/saw/sf14_cdma_e.pdf?src-supplier=Avnet+Asia, ComponentLink3Description=http://global.kyocera.com/prdct/function/products/saw-device/pdf/sf14_gnss_e.pdf?src-supplier=Digi-Key, ComponentLink3URL=http://global.kyocera.com/prdct/function/products/saw-device/pdf/sf14_gnss_e.pdf?src-supplier=Digi-Key, Impedance=50R, Insertion Loss=1.2dB, Length=1.4mm, Load Impedance=50R, Manufacturer Part Number=SF14-1582M5UUD2, Mount="Surface Mount", Number of Pins=5, Packaging="Tape and Reel", Pricing 1="1=0,62000, 10=0,58500, 50=0,46600, 100=0,38000, 1000=0,30700, 10000=0,26100 (USD)", RoHS=Yes, RoHS Compliant=Yes, Stock 1=11334, Supplier 1=Mouser, Termination=SMD/SMT
SIM1: Manufacturer=Hologram, Supplier Part Number 1=1887-SIM-E-MFF2-GLCT-ND, Manufacturer Part Number=SIM-E-MFF2-GL, Pricing 1="1=5,43000, 10=4,87900, 25=4,61240, 100=3,99750, 250=3,79248, 500=3,40300 (USD)", RoHS=No, Stock 1=2884, Supplier 1=Digi-Key

## Via types
v1: diameter 23.62, hole 11.81, Top Layer to Bottom Layer, 9 vias
v2: diameter 137.8, hole 11.81, Top Layer to Bottom Layer, 1 vias
v3: diameter 98.43, hole 39.37, Top Layer to Bottom Layer, 1 vias

## Nets (pads, with @x,y where several pads share a name; then routed paths per layer and width w, separated by ;. In a path a pad name is that pad's centre, name@x,y a point inside that pad or via, vN(x,y) a via of type N, cw(c..) or ccw(c..) an arc to the next point about the centre after c; other vN are vias at no path point)
868_VDD: C4.2 C10.1 C12.2 FB2.1 IC1.34 IC1.35 | length 341.5
  Bottom Layer w30: C10.1@1516.91,459.62 C4.2@1558.09,459.62 ; IC1.35 1519.99,515.41 C10.1@1519.99,462.7 ; C4.2@1561.91,459.62 1623.34,459.62 1638.6,444.37 1638.6,362.09 1628.54,362.09 1623.86,357.4 FB2.1 ; C4.2@1562.6,460.31 IC1.34
BT_ANT: C5.2 IC1.20 L2.2 | length 138.3
  Bottom Layer w21.59: IC1.20 1519.68,1209.4 1519.68,1244.68 1528.9,1253.9 L2.2 C5.2
GND: C1.1 C2.2 C3.1 C4.1 C6.2 C10.2 C12.1 Conn1.2 IC1.8 IC1.13 IC1.19 IC1.21 IC1.27 IC1.30 IC1.31 IC1.33 IC1.36 IC1.37 IC1.45 IC1.63 IC1.66 IC1.67 IC1.69 IC1.70 IC1.71 IC1.72 IC1.73 IC1.74 IC1.75 IC1.76 IC1.77 L2.1 P1.3 P2.5 SAW1.2 SAW1.3 SAW1.5 SIM1.1 SIM1.9
GPIO1: IC1.57 R1.2 | length 100.4
  Top Layer w10: v1(1595,1125) 1596.92,1123.08 1623.65,1123.08 1633.19,1113.54 1634.17,1113.54 1640,1107.72 R1.2
  Bottom Layer w10: IC1.57 1554.72,1112.28 1567.44,1125 v1(1595,1125)
GPS_ANT: IC1.68 SAW1.4 | length 152.4
  Bottom Layer w21.59: 1150.32,495 1150.32,540.83 1213.16,603.67 1217.1,603.67 1224.02,610.59 IC1.68
GPS_RX: IC1.22 IC1.62 | length 385.3
  Bottom Layer w6: IC1.62 1603.94,835 1618.65,849.72 1618.65,853.65 1650,885 1650,975 1668.32,993.32 1726.73,993.32 1738.92,1005.51 1738.92,1075.17 1724.44,1089.65 1713.34,1100.75 IC1.22
GPS_TX: IC1.23 IC1.61 P2.4 | length 1110.3
  Top Layer w10: v1(1295,1320) 1295.73,1320.73 1295.73,1378.72 P2.4
  Bottom Layer w10: v1(1295,1320) 1220,1320 1175,1275 1175,1160.86 1180.86,1155 1365,1155 1365.86,1155.86 1374.14,1155.86 1375,1155 1605,1155 1635,1125 1635,1100 1677.56,1057.44 IC1.23@1682.43,1057.44 ; IC1.61 1603.94,890.12 1616.65,902.83 1632.81,918.99 1632.81,1000.46 1676.13,1043.79 1676.13,1051.15 IC1.23@1682.43,1057.44 ; IC1.23 IC1.23@1682.43,1057.44
GPSPWRCTRL: P1.1
GSM_ANT: Conn1.1 IC1.32 | length 246.9
  Bottom Layer w21.59: IC1.32 1742.32,667.68 1770,640 1770,483.25 Conn1.1
NetBLE1_1: BLE1.1 C5.1 | length 219.7
  Bottom Layer w19.68: C5.1 1740,1290
  Bottom Layer w31.5: 1740,1290 1782.12,1290
  Bottom Layer w33.46: 1782.12,1290 BLE1.1@1782.12,1345.32
NetC7_2: C7.2 D1.2 IC1.28 | length 171.1
  Bottom Layer w10: IC1.28@1674.36,838.94 1758.46,838.94 D1.2@1770,827.4
  Bottom Layer w19.68: D1.2 1775,807.42 1786.81,795.61 1812.11,795.61 1821.46,786.26 1822.24,786.26 1825,783.5 C7.2
NetIC1_59: IC1.59 R1.1 | length 92
  Top Layer w10: v1(1640,1040) R1.1
  Bottom Layer w10: IC1.59 1603.94,1000.35 1616.65,1013.07 1616.65,1017.01 1639.65,1040 v1(1640,1040)
NETRX: IC1.2 P2.2 | length 1259.4
  Bottom Layer w10: 1014.39,1119.45 1014.39,719.43 1037.04,696.78 IC1.2@1056.89,676.93 ; 1015,1120.05 1015,1385 1070,1440 1452.99,1440 P2.2
NETTX: IC1.1 P2.1 | length 1192.5
  Bottom Layer w10: IC1.1@1094.05,622.11 1125,653.06 1125,1275 1195,1345 1562.01,1345 P2.1
PWRKEY: IC1.39 P1.2 | length 523.1
  Bottom Layer w10: IC1.39@1345,528.39 1345,501.17 1352.36,493.81 1360.03,493.81 1366.56,487.28 1366.56,486.97 1379.92,473.61 1505,348.53 1505,144.02 P1.2
SIM_CLK: C3.2 IC1.16 SIM1.6 | length 611.7
  Top Layer w10: C3.2@1272.72,917.3 1272.72,934.08 ; SIM1.6 1280.46,964.25 1280.46,941.82 1272.72,934.08 ; v1(1327.9,1246.86) 1327.9,1265.02 1325.97,1266.95 1226.96,1266.95 1214.16,1254.14 1214.16,945.84 1225.92,934.08 1272.72,934.08
  Bottom Layer w10: v1(1327.9,1246.86) 1346.06,1228.7 IC1.16
SIM_DATA: IC1.15 SIM1.3 | length 94.8
  Top Layer w10: SIM1.3 1285,1243.16 v1(1285.98,1244.14)
  Bottom Layer w10: v1(1285.98,1244.14) 1286.65,1244.14 1302.76,1228.03 IC1.15
SIM_RST: C1.2 IC1.17 SIM1.7 | length 429.7
  Top Layer w10: C1.2 1335,976.66 1339.84,981.5 1341.5,981.5 1357.5,997.5 1399.61,997.5 1407.53,1005.42 v1(1407.53,1246.86)
  Bottom Layer w10: IC1.17 1389.37,1228.7 v1(1407.53,1246.86)
SIM_VDD: C6.1 IC1.18 SIM1.8 | length 414.2
  Top Layer w10: SIM1.8 1385,960.91 SIM1.8@1390,955.91 ; C6.1 1390,960 1425,995 1425,1221.02 v1(1450.84,1246.86)
  Bottom Layer w10: IC1.18 1432.68,1228.7 v1(1450.84,1246.86)
V4V: C2.1 C7.1 D1.1 FB2.2 P2.3 | length 3652.8
  Top Layer w40: v1(1025,29.78) v1(1025,60) 1025,1406.57 1061.95,1443.52 1349.47,1443.52 P2.3
  Bottom Layer w6: D1.1 1825,742.6 1842.7,742.6 1855,730.3 1855,246.61 1840.58,232.19 1833.77,232.19 C2.1@1798.39,196.81
  Bottom Layer w40: v1(1025,60) v1(1025,29.78) 1781.57,29.78 1805,53.22 C2.1@1805,195 ; FB2.2 1623.23,282.6 1640.83,265 1771.57,265 1795,241.57 1795,210 1795,193.39 C2.1
pads on no net: BLE1.2 IC1.3 IC1.4 IC1.5 IC1.6 IC1.7 IC1.9 IC1.10 IC1.11 IC1.12 IC1.14 IC1.24 IC1.25 IC1.26 IC1.29 IC1.38 IC1.40 IC1.41 IC1.42 IC1.43 IC1.44 IC1.46 IC1.47 IC1.48 IC1.49 IC1.50 IC1.51 IC1.52 IC1.53 IC1.54 IC1.55 IC1.56 IC1.58 IC1.60 IC1.64 IC1.65 SAW1.1 SIM1.2 SIM1.4 SIM1.5
copper on no net: | length 295.3
  Bottom Layer w19.68: 1765.66,1177.87 1844.4,1177.87 ; 1766.74,1177.87 1766.74,1217.24 ; 1845.66,1177.87 1845.66,1355.03
  other v2: 1355,320
  other v3: 1355,320

## Polygon pours and split planes (outlines as drawn)
GND on Top Layer "GND_L01_P000" (solid, remove dead copper, pour order 0): 1005,1455 1005.59,1455.59 1855,1455.59 1855,5 1005,5
GND on Bottom Layer "GND_L02_P001" (solid, remove dead copper, pour order 1): 1005,1455 1005.59,1455.59 1855,1455.59 1855,5 1005,5

## Keep-outs
Keep-Out Layer:
  region: 1855,1154.05 1855,1455.59 1750,1455.59 1750,1154.05

## Other copper
Top Layer:
  rectangle: 2065,693.46 2781.54,1410

## Silkscreen, mask and mechanical layers (free items; w line width, h text height)
Top Overlay:
  drawing of 5 lines, arcs and shapes, not listed
  text "V2.0" at 2370.03,1705.01 h60
  text "2021" at 2395.03,1590.01 h60
Top Courtyard:
  region: 1221.74,11.69 1702.68,186.74 1527.63,667.68 1046.69,492.63